# Altium PCB classyTKL.PcbDoc (part 1 of 2)
Units mm, origin at the board's own origin, x right, y up, seen from the top; angles counter-clockwise.
Board outline 346.59 x 122.85 mm, 2 copper layers (Component Side, Bottom Layer), stack 1.571 mm thick; 202 components, 127 nets, 857 pads, 41 vias.
Unrouted connection lines stored in the file: 1.
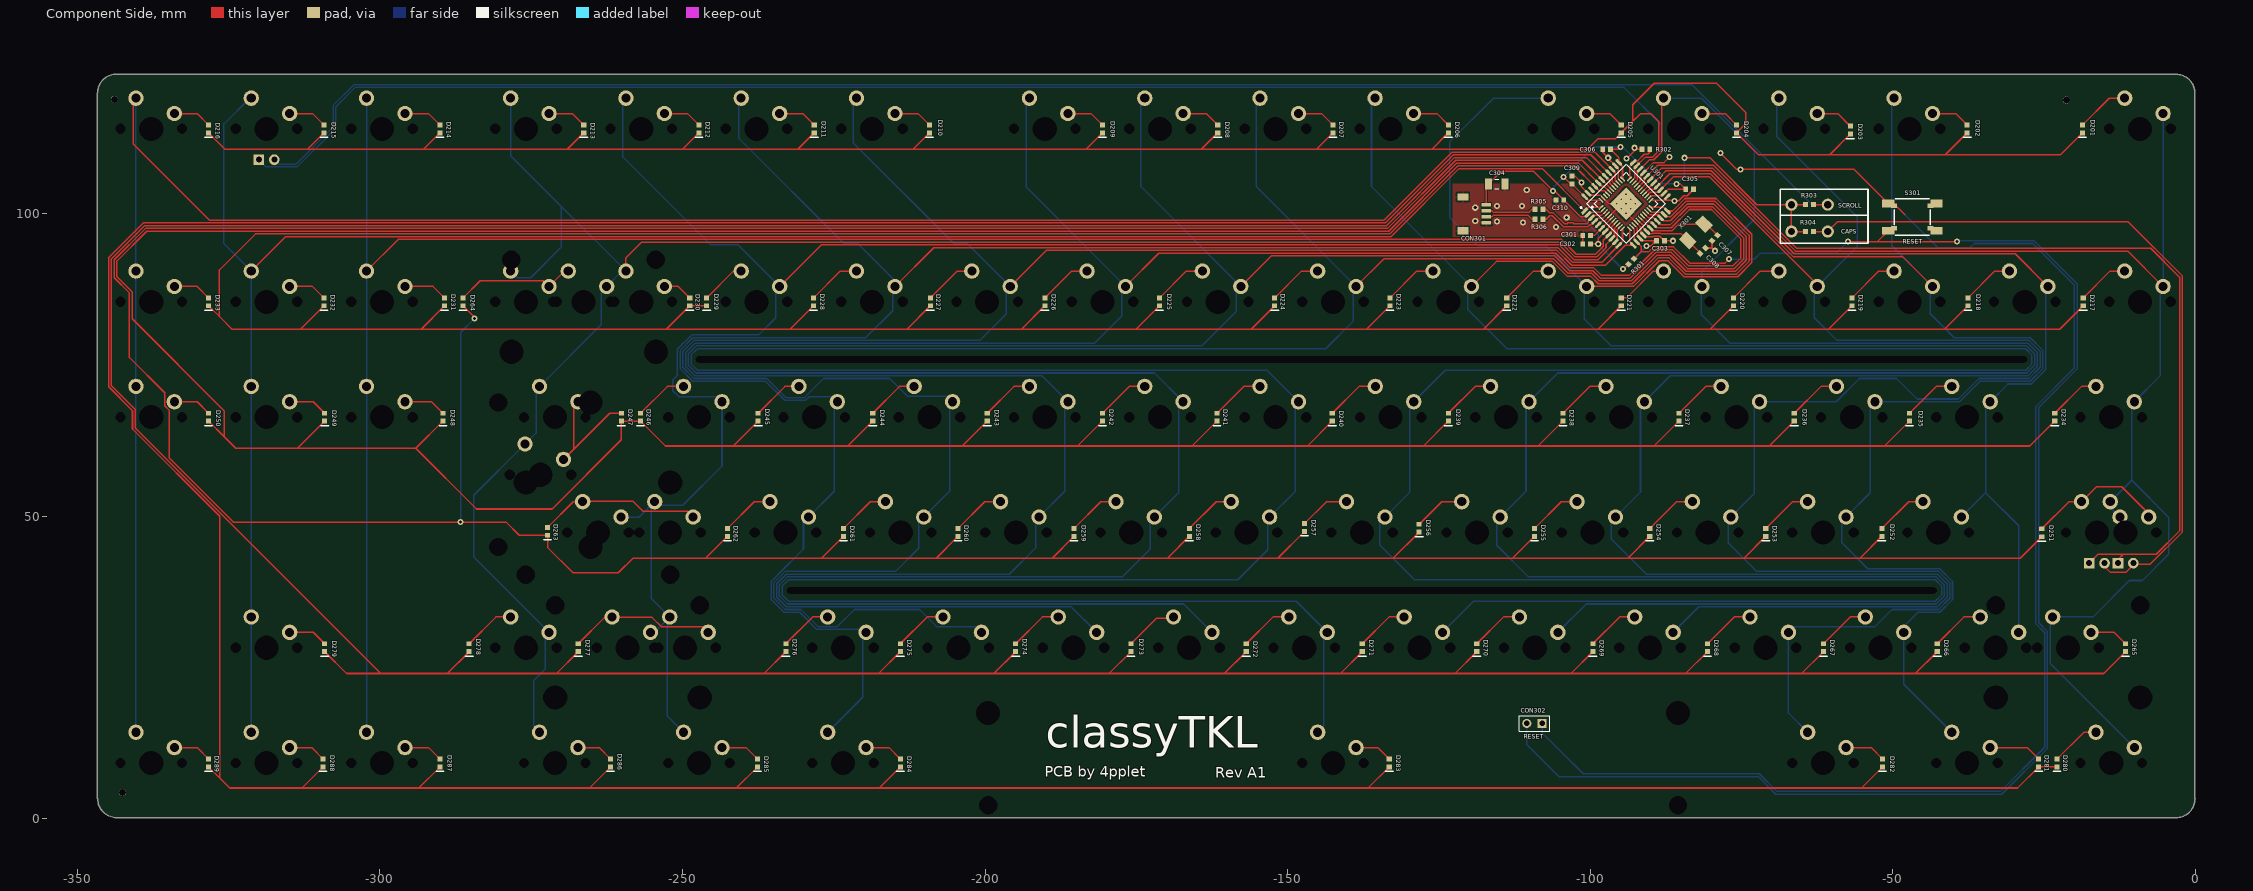
[diagram p0: Component Side view]
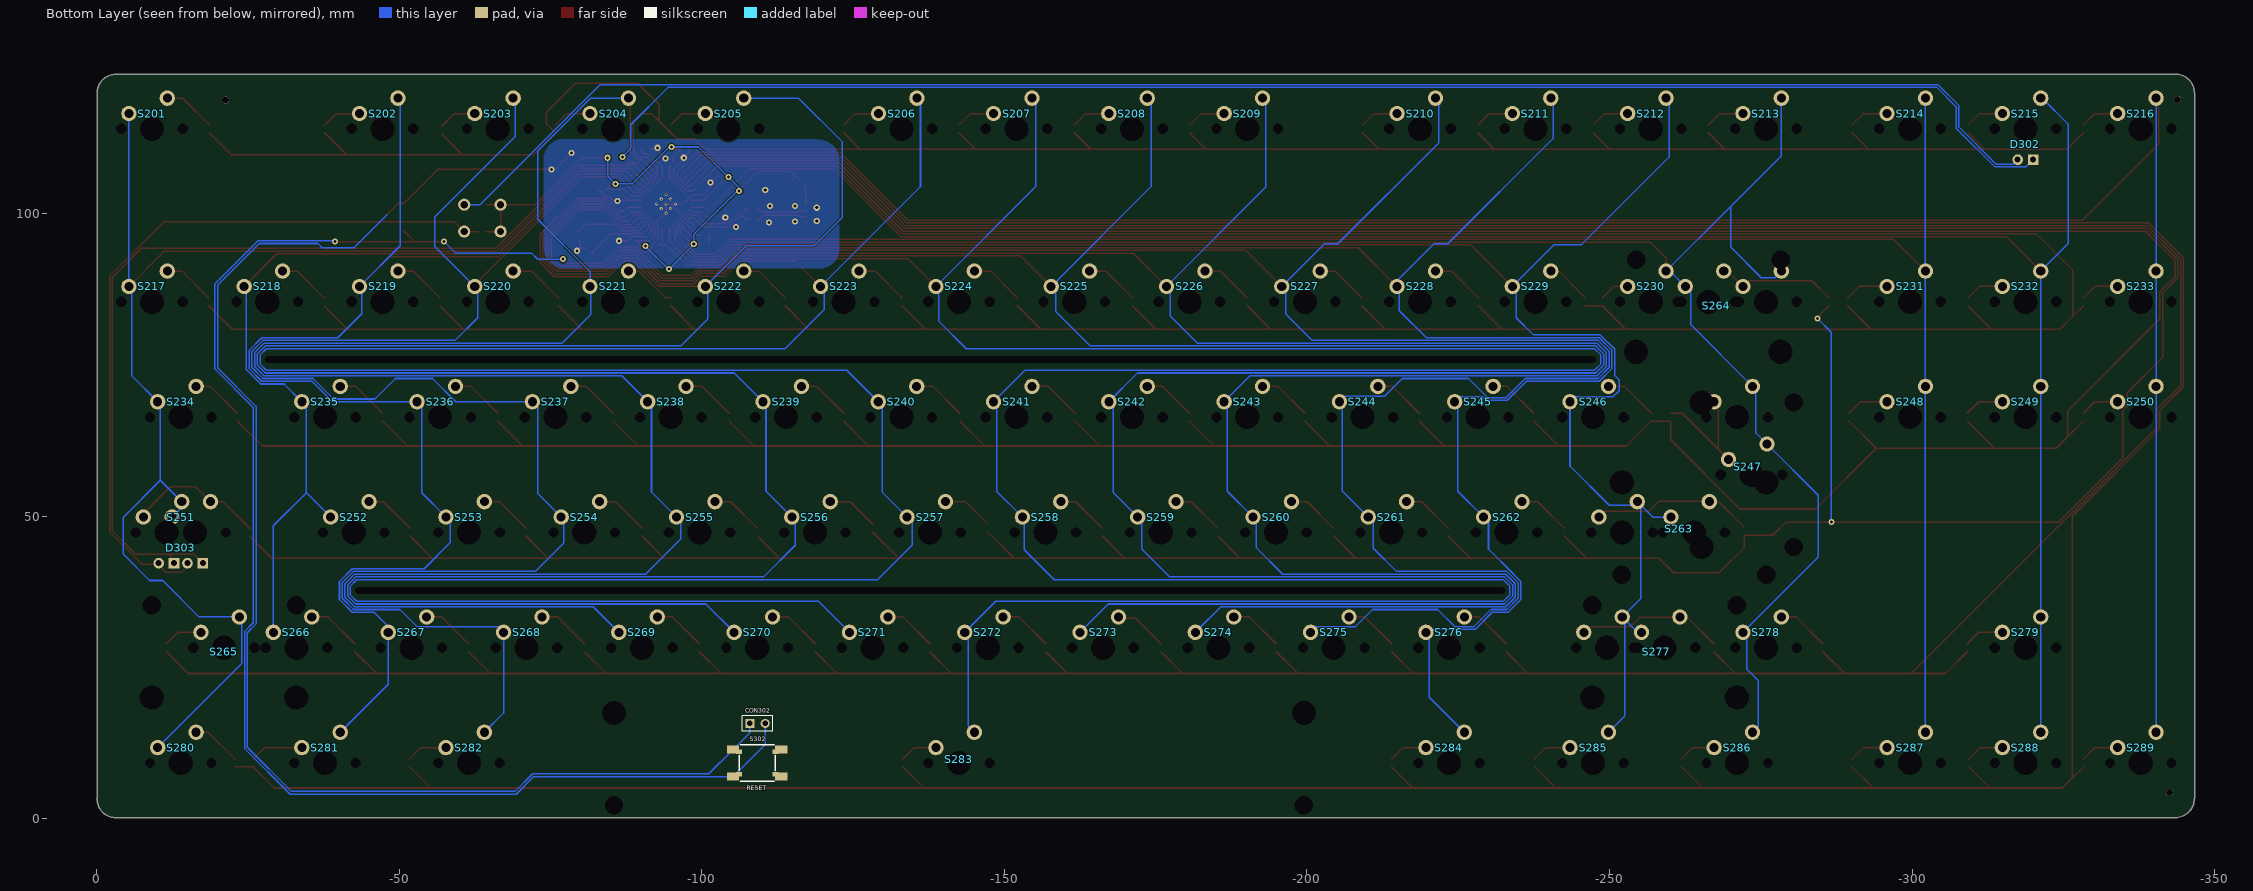
[diagram p1: Bottom Layer view, seen from below]
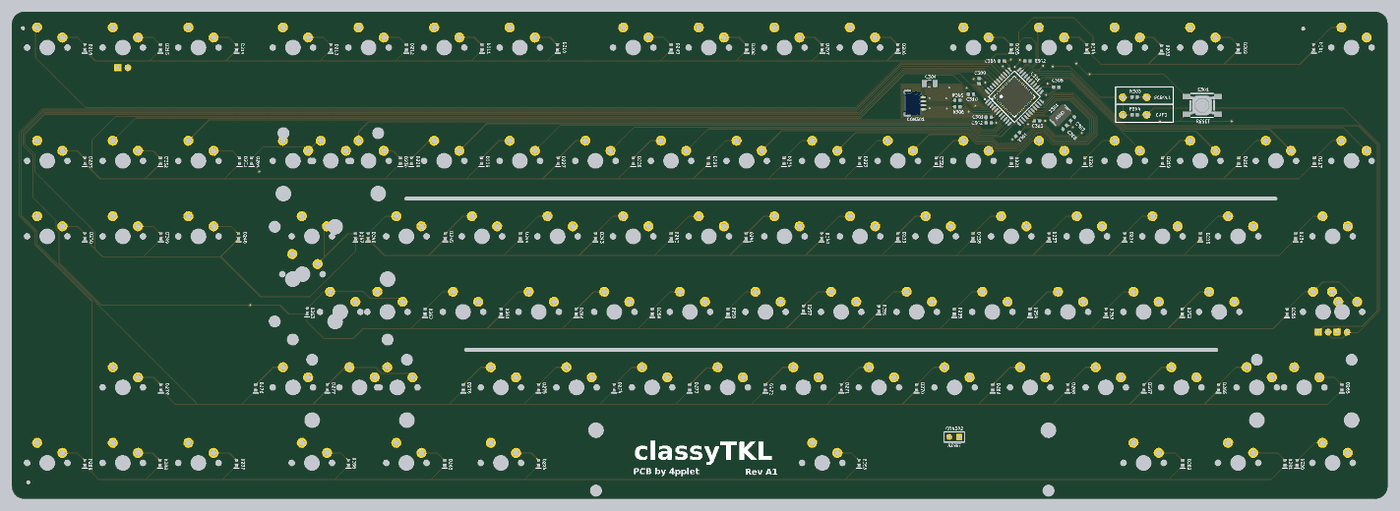
[diagram p3: 3D render of the assembled board from above, using the file's embedded part models]

## Layer stack, top to bottom
Top Solder: solder mask 0.0102, Solder Resist, Dk 3.5
Component Side: signal copper 0.0356
Dielectric 1: core 1.5, FR-4, Dk 4.2
Bottom Layer: signal copper 0.0356
Solder Side: solder mask 0.0102, Solder Resist, Dk 3.5

## Board outline
-346.626,3.234 cw(c-346.531,3.319) -346.659,3.319 -346.659,119.9 cw(c-343.532,119.9) -343.532,123.027 cw(c-343.532,122.9) -343.473,123.013 -3.204,123.013 cw(c-3.204,119.886) -0.077,119.886 -0.077,3.332 cw(c-0.2,3.3) -0.073,3.3 cw(c-3.2,3.3) -3.2,0.173 cw(c-3.2,0.3) -3.267,0.192 -343.5,0.192 cw(c-343.5,3.319)

## Design rules (kind name [scope] priority, off if disabled: settings)
Clearance [All] p1: gap=0.2 ignorepadtopadclearanceinfootprint=FALSE except(0: Arc-Hole Track-Hole SMDPad-Hole THPad-Hole Via-Hole Fill-Hole Poly-Hole Region-Hole Text-Hole; 0.254: THPad-THPad THPad-Via THPad-Fill THPad-Poly THPad-Region THPad-Text Via-Via Via-Fill Via-Poly Via-Region Via-Text Fill-Fill Fill-Poly Fill-Region Fill-Text Poly-Poly Poly-Region Poly-Text Region-Region Region-Text Text-Text)
ComponentClearance [InComponent('No Component') And OnLayer('Component Side')] p1: gap=0.254 collisioncheckmode=3 verticalgap=0.254 showdistances=FALSE
DiffPairsRouting DiffPairsRouting_USB [InDifferentialPairClass('All Differential Pairs')] p1: maxlimit=0.254 minlimit=0.203 mostfreqgap=0.203 toplayer_minwidth=0.152 toplayer_maxwidth=0.381 toplayer_prefwidth=0.152 bottomlayer_minwidth=0.152 bottomlayer_maxwidth=0.381 bottomlayer_prefwidth=0.152 maxuncoupledlength=12.7
DiffPairsRouting [All] p2: maxlimit=0.254 minlimit=0.254 mostfreqgap=0.254 toplayer_minwidth=0.381 toplayer_maxwidth=0.381 toplayer_prefwidth=0.381 bottomlayer_minwidth=0.381 bottomlayer_maxwidth=0.381 bottomlayer_prefwidth=0.381 maxuncoupledlength=12.7
HoleSize [All] p1: absolutevalues=TRUE maxlimit=20 minlimit=0.025 maxpercent=80.000 minpercent=20.000
MatchedLengths MatchedLengths_USB_DiffPairs_1 [All] p1: tolerance=0.127 checknetsindiffpair=TRUE checkdiffpairvsdiffpair=FALSE checkxsignals=FALSE checkothers=FALSE
MatchedLengths MatchedLengths_USB_DiffPairs [All] p2: tolerance=0.127 checknetsindiffpair=TRUE checkdiffpairvsdiffpair=FALSE checkxsignals=FALSE checkothers=FALSE
PolygonConnect PolygonConnect_1 [All vs IsVia] p1: connectstyle=Direct reliefconductorwidth=0.254 reliefentries=4 polygonreliefangle="90 Angle" airgapwidth=0.254
PolygonConnect [All] p2: connectstyle=Relief reliefconductorwidth=0.254 reliefentries=4 polygonreliefangle="90 Angle" airgapwidth=0.254
RoutingVias [All] p1: holewidth=0.711 width=1.27 viastyle="Through Hole" minholewidth=0.711 minwidth=1.27 maxholewidth=0.711 maxwidth=1.27
SolderMaskExpansion [All] p1: expansion=0.102
Width [All] p1: maxlimit=0.254 minlimit=0.203 preferedwidth=0.254
27 further rules are at their usual default settings.

## Classes and differential pairs
component class Designator: C201 C202 C203 C204 C205 C206 D201 D202 D203 D204 D205 D206 D207 D208 D209 D210 D211 D212 D213 D214 D215 D216 D217 D218 D219 D220 D221 D222 D223 D224 D225 D226 D227 D228 D229 D230 D231 D232 D233 D234 D235 D236 D237 D238 D239 D240 D241 D242 D243 D244 D245 D246 D247 D248 D249 D250 D251 D252 D253 D254 D255 D256 D257 D258 D259 D260 D261 D262 D263 D264 D265 D266 D267 D268 D269 D270 D271 D272 D273 D274 D275 D276 D277 D278 D279 D280 D281 D282 D283 D284 D285 D286 D287 D288 D289 S201 S202 S203 S204 S205 S206 S207 S208 S209 S210 S211 S212 S213 S214 S215 S216 S217 S218 S219 S220 S221 S222 S223 S224 S225 S226 S227 S228 S229 S230 S231 S232 S233 S234 S235 S236 S237 S238 S239 S240 S241 S242 S243 S244 S245 S246 S247 S248 S249 S250 S251 S252 S253 S254 S255 S256 S257 S258 S259 S260 S261 S262 S263 S264 S265 S266 S267 S268 S269 S270 S271 S272 S273 S274 S275 S276 S277 S278 S279 S280 S281 S282 S283 S284 S285 S286 S287 S288 S289
differential pair D_PRE: +D_PRE_P -D_PRE_N
differential pair D: +D_P -D_N

## Components (designator, comment, footprint, x,y, rotation, side; value= is the part's Value field where it differs from the comment)
C301 "" C0603[1608] -100.584,96.393 r0 top value=1uF
C302 "" C0603[1608] -100.584,94.996 r0 top value=0.1uF
C303 "" C0603[1608] -88.392,95.504 r180 top value=0.1uF
C304 "" C1206[3216] -115.443,104.902 r180 top value=4,7uF
C305 "" C0603[1608] -83.566,104.013 r180 top value=0.1uF
C306 "" C0603[1608] -97.282,110.617 r0 top value=0.1uF
C307 "" C0603[1608] -79.423,95.964 r45 top value=36pF
C308 "" C0603[1608] -81.407,93.853 r225 top value=36pF
C309 "" C0603[1608] -102.997,105.537 r270 top value=0.1uF
C310 "" C0603[1608] -105.029,102.235 r0 top value=0.1uF
CON301 "Header 5" "JST SM04B-SRSS-TB" -121.031,102.755 r270 top
CON302 "Header 2" HDR1X2 -107.95,15.748 r180 top
D201 "Diode" D0603[1608] -18.669,113.99 r270 top
D202 "Diode" D0603[1608] -37.719,113.99 r270 top
D203 "Diode" D0603[1608] -57.023,113.792 r270 top
D204 "Diode" D0603[1608] -75.819,113.99 r270 top
D205 "Diode" D0603[1608] -94.869,113.99 r270 top
D206 "Diode" D0603[1608] -123.444,113.99 r270 top
D207 "Diode" D0603[1608] -142.494,113.99 r270 top
D208 "Diode" D0603[1608] -161.544,113.99 r270 top
D209 "Diode" D0603[1608] -180.594,113.99 r270 top
D210 "Diode" D0603[1608] -209.169,113.99 r270 top
D211 "Diode" D0603[1608] -228.219,113.99 r270 top
D212 "Diode" D0603[1608] -247.269,113.99 r270 top
D213 "Diode" D0603[1608] -266.319,113.99 r270 top
D214 "Diode" D0603[1608] -290.068,113.99 r270 top
D215 "Diode" D0603[1608] -309.245,113.99 r270 top
D216 "Diode" D0603[1608] -328.295,113.99 r270 top
D217 "Diode" D0603[1608] -18.542,85.415 r270 top
D218 "Diode" D0603[1608] -37.592,85.415 r270 top
D219 "Diode" D0603[1608] -56.769,85.415 r270 top
D220 "Diode" D0603[1608] -76.327,85.415 r270 top
D221 "Diode" D0603[1608] -94.869,85.415 r270 top
D222 "Diode" D0603[1608] -113.792,85.415 r270 top
D223 "Diode" D0603[1608] -133.096,85.415 r270 top
D224 "Diode" D0603[1608] -152.146,85.415 r270 top
D225 "Diode" D0603[1608] -171.196,85.415 r270 top
D226 "Diode" D0603[1608] -190.119,85.415 r270 top
D227 "Diode" D0603[1608] -209.042,85.415 r270 top
D228 "Diode" D0603[1608] -228.346,85.415 r270 top
D229 "Diode" D0603[1608] -245.999,85.415 r270 top
D230 "Diode" D0603[1608] -248.793,85.415 r270 top
D231 "Diode" D0603[1608] -289.306,85.415 r270 top
D232 "Diode" D0603[1608] -309.245,85.415 r270 top
D233 "Diode" D0603[1608] -328.295,85.415 r270 top
D234 "Diode" D0603[1608] -23.241,66.365 r270 top
D235 "Diode" D0603[1608] -47.244,66.365 r270 top
D236 "Diode" D0603[1608] -66.294,66.365 r270 top
D237 "Diode" D0603[1608] -85.344,66.365 r270 top
D238 "Diode" D0603[1608] -104.521,66.365 r270 top
D239 "Diode" D0603[1608] -123.444,66.365 r270 top
D240 "Diode" D0603[1608] -142.621,66.365 r270 top
D241 "Diode" D0603[1608] -161.671,66.365 r270 top
D242 "Diode" D0603[1608] -180.594,66.365 r270 top
D243 "Diode" D0603[1608] -199.644,66.365 r270 top
D244 "Diode" D0603[1608] -218.567,66.365 r270 top
D245 "Diode" D0603[1608] -237.49,66.365 r270 top
D246 "Diode" D0603[1608] -256.921,66.365 r270 top
D247 "Diode" D0603[1608] -260.096,66.365 r270 top
D248 "Diode" D0603[1608] -289.56,66.365 r270 top
D249 "Diode" D0603[1608] -309.118,66.365 r270 top
D250 "Diode" D0603[1608] -328.295,66.365 r270 top
D251 "Diode" D0603[1608] -25.4,47.259 r270 top
D252 "Diode" D0603[1608] -51.816,47.315 r270 top
D253 "Diode" D0603[1608] -70.993,47.315 r270 top
D254 "Diode" D0603[1608] -90.17,47.315 r270 top
D255 "Diode" D0603[1608] -109.22,47.315 r270 top
D256 "Diode" D0603[1608] -128.27,48.006 r270 top
D257 "Diode" D0603[1608] -147.193,48.133 r270 top
D258 "Diode" D0603[1608] -166.243,47.315 r270 top
D259 "Diode" D0603[1608] -185.293,47.315 r270 top
D260 "Diode" D0603[1608] -204.47,47.315 r270 top
D261 "Diode" D0603[1608] -223.393,47.315 r270 top
D262 "Diode" D0603[1608] -242.57,47.315 r270 top
D263 "Diode" D0603[1608] -272.288,47.498 r270 top
D264 "Diode" D0603[1608] -286.258,85.415 r270 top
D265 "Diode" D0603[1608] -11.557,28.265 r270 top
D266 "Diode" D0603[1608] -42.672,28.265 r270 top
D267 "Diode" D0603[1608] -61.468,28.265 r270 top
D268 "Diode" D0603[1608] -80.645,28.265 r270 top
D269 "Diode" D0603[1608] -99.568,28.265 r270 top
D270 "Diode" D0603[1608] -118.745,28.265 r270 top
D271 "Diode" D0603[1608] -137.668,28.265 r270 top
D272 "Diode" D0603[1608] -156.845,28.265 r270 top
D273 "Diode" D0603[1608] -175.895,28.265 r270 top
D274 "Diode" D0603[1608] -194.945,28.265 r270 top
D275 "Diode" D0603[1608] -213.995,28.265 r270 top
D276 "Diode" D0603[1608] -232.918,28.265 r270 top
D277 "Diode" D0603[1608] -267.208,28.265 r270 top
D278 "Diode" D0603[1608] -285.242,28.265 r270 top
D279 "Diode" D0603[1608] -309.118,28.265 r270 top
D280 "Diode" D0603[1608] -22.86,9.215 r270 top
D281 "Diode" D0603[1608] -25.908,9.215 r270 top
D282 "Diode" D0603[1608] -51.689,9.215 r270 top
D283 "Diode" D0603[1608] -133.223,9.215 r270 top
D284 "Diode" D0603[1608] -213.995,9.215 r270 top
D285 "Diode" D0603[1608] -237.617,9.215 r270 top
D286 "Diode" D0603[1608] -261.874,9.215 r270 top
D287 "Diode" D0603[1608] -290.068,9.215 r270 top
D288 "Diode" D0603[1608] -309.372,9.215 r270 top
D289 "Diode" D0603[1608] -328.295,9.215 r270 top
D302 "LED0" "MX-SWITCH - LED" -318.712,113.99 r180 bottom
D303 "LED0" "MX-SWITCH - CAPS - LED NO SWITCH" -16.294,47.315 r180 bottom
R301 "Res1" R0603[1608] -93.218,92.075 r45 top value=10K
R302 "Res1" R0603[1608] -90.805,110.617 r180 top value=10K
R303 "Res1" "R0603[1608] - THT" -63.754,101.473 r0 top value=150
R304 "Res1" "R0603[1608] - THT" -63.754,97.028 r0 top value=150
R305 "Res1" R0603[1608] -108.458,100.711 r180 top value=22
R306 "Res1" R0603[1608] -108.458,99.06 r180 top value=22
S201 "MX" "MX-SWITCH - SWITCHED POL" -9.15,113.99 r180 bottom locked
S202 "MX" MX-SWITCH -47.25,113.99 r180 bottom locked
S203 "MX" MX-SWITCH -66.3,113.99 r180 bottom locked
S204 "MX" MX-SWITCH -85.35,113.99 r180 bottom locked
S205 "MX" MX-SWITCH -104.4,113.99 r180 bottom locked
S206 "MX" MX-SWITCH -133.005,113.99 r180 bottom locked
S207 "MX" MX-SWITCH -152.025,113.99 r180 bottom locked
S208 "MX" MX-SWITCH -171.075,113.99 r180 bottom locked
S209 "MX" MX-SWITCH -190.125,113.99 r180 bottom locked
S210 "MX" MX-SWITCH -218.7,113.99 r180 bottom locked
S211 "MX" MX-SWITCH -237.75,113.99 r180 bottom locked
S212 "MX" MX-SWITCH -256.8,113.99 r180 bottom locked
S213 "MX" MX-SWITCH -275.85,113.99 r180 bottom locked
S214 "MX" MX-SWITCH -299.662,113.99 r180 bottom locked
S215 "MX" MX-SWITCH -318.712,113.99 r180 bottom locked
S216 "MX" MX-SWITCH -337.762,113.99 r180 bottom locked
S217 "MX" "MX-SWITCH - SWITCHED POL" -9.15,85.415 r180 bottom locked
S218 "MX" "MX-SWITCH - SWITCHED POL" -28.2,85.415 r180 bottom locked
S219 "MX" "MX-SWITCH - SWITCHED POL" -47.25,85.415 r180 bottom locked
S220 "MX" "MX-SWITCH - SWITCHED POL" -66.3,85.415 r180 bottom locked
S221 "MX" "MX-SWITCH - SWITCHED POL" -85.35,85.415 r180 bottom locked
S222 "MX" "MX-SWITCH - SWITCHED POL" -104.4,85.415 r180 bottom locked
S223 "MX" "MX-SWITCH - SWITCHED POL" -123.45,85.415 r180 bottom locked
S224 "MX" "MX-SWITCH - SWITCHED POL" -142.5,85.415 r180 bottom locked
S225 "MX" "MX-SWITCH - SWITCHED POL" -161.55,85.415 r180 bottom locked
S226 "MX" "MX-SWITCH - SWITCHED POL" -180.6,85.415 r180 bottom
S227 "MX" "MX-SWITCH - SWITCHED POL" -199.65,85.415 r180 bottom locked
S228 "MX" "MX-SWITCH - SWITCHED POL" -218.7,85.415 r180 bottom locked
S229 "MX" "MX-SWITCH - SWITCHED POL" -237.75,85.415 r180 bottom locked
S230 "MX" MX-SWITCH -256.8,85.415 r180 bottom locked
S231 "MX" MX-SWITCH -299.662,85.415 r180 bottom locked
S232 "MX" MX-SWITCH -318.712,85.415 r180 bottom locked
S233 "MX" MX-SWITCH -337.762,85.415 r180 bottom locked
S234 "MX" "MX-SWITCH - 1.5U - SWITCHED POL" -13.912,66.365 r180 bottom locked
S235 "MX" "MX-SWITCH - SWITCHED POL" -37.725,66.365 r180 bottom locked
S236 "MX" "MX-SWITCH - SWITCHED POL" -56.775,66.365 r180 bottom locked
S237 "MX" "MX-SWITCH - SWITCHED POL" -75.825,66.365 r180 bottom locked
S238 "MX" "MX-SWITCH - SWITCHED POL" -94.875,66.365 r180 bottom locked
S239 "MX" "MX-SWITCH - SWITCHED POL" -113.925,66.365 r180 bottom locked
S240 "MX" "MX-SWITCH - SWITCHED POL" -132.975,66.365 r180 bottom locked
S241 "MX" "MX-SWITCH - SWITCHED POL" -152.025,66.365 r180 bottom locked
S242 "MX" "MX-SWITCH - SWITCHED POL" -171.075,66.365 r180 bottom locked
S243 "MX" "MX-SWITCH - SWITCHED POL" -190.125,66.365 r180 bottom locked
S244 "MX" "MX-SWITCH - SWITCHED POL" -209.175,66.365 r180 bottom locked
S245 "MX" "MX-SWITCH - SWITCHED POL" -228.225,66.365 r180 bottom locked
S246 "MX" "MX-SWITCH - SWITCHED POL" -247.275,66.365 r180 bottom locked
S247 "MX" "MX-SWITCH - PIPE_ISO_ENTER" -271.087,66.365 r0 bottom locked
S248 "MX" MX-SWITCH -299.662,66.365 r180 bottom locked
S249 "MX" MX-SWITCH -318.712,66.365 r180 bottom locked
S250 "MX" MX-SWITCH -337.762,66.365 r180 bottom locked
S251 "MX" "MX-SWITCH - CAPS" -16.294,47.315 r180 bottom locked
S252 "MX" "MX-SWITCH - SWITCHED POL" -42.487,47.315 r180 bottom locked
S253 "MX" "MX-SWITCH - SWITCHED POL" -61.537,47.315 r180 bottom locked
S254 "MX" "MX-SWITCH - SWITCHED POL" -80.587,47.315 r180 bottom locked
S255 "MX" "MX-SWITCH - SWITCHED POL" -99.637,47.315 r180 bottom locked
S256 "MX" "MX-SWITCH - SWITCHED POL" -118.687,47.315 r180 bottom locked
S257 "MX" "MX-SWITCH - SWITCHED POL" -137.737,47.315 r180 bottom locked
S258 "MX" "MX-SWITCH - SWITCHED POL" -156.787,47.315 r180 bottom locked
S259 "MX" "MX-SWITCH - SWITCHED POL" -175.837,47.315 r180 bottom locked
S260 "MX" "MX-SWITCH - SWITCHED POL" -194.887,47.315 r180 bottom locked
S261 "MX" "MX-SWITCH - SWITCHED POL" -213.937,47.315 r180 bottom locked
S262 "MX" "MX-SWITCH - SWITCHED POL" -232.987,47.315 r180 bottom locked
S263 "MX" "MX-switch - Enter_ANSI_ISO_KEY" -263.95,47.315 r180 bottom locked
S264 "MX" "MX-SWITCH - BACKSPACE" -266.325,85.415 r180 bottom locked
S265 "MX" "MX-switch - 2.25U" -21.056,28.265 r180 bottom locked
S266 "MX" "MX-SWITCH - SWITCHED POL" -33.02,28.265 r180 bottom locked
S267 "MX" "MX-SWITCH - SWITCHED POL" -52.012,28.265 r180 bottom locked
S268 "MX" "MX-SWITCH - SWITCHED POL" -71.062,28.265 r180 bottom locked
S269 "MX" "MX-SWITCH - SWITCHED POL" -90.112,28.265 r180 bottom locked
S270 "MX" "MX-SWITCH - SWITCHED POL" -109.162,28.265 r180 bottom locked
S271 "MX" "MX-SWITCH - SWITCHED POL" -128.212,28.265 r180 bottom locked
S272 "MX" "MX-SWITCH - SWITCHED POL" -147.262,28.265 r180 bottom locked
S273 "MX" "MX-SWITCH - SWITCHED POL" -166.312,28.265 r180 bottom locked
S274 "MX" "MX-SWITCH - SWITCHED POL" -185.362,28.265 r180 bottom locked
S275 "MX" "MX-SWITCH - SWITCHED POL" -204.412,28.265 r180 bottom locked
S276 "MX" "MX-SWITCH - SWITCHED POL" -223.462,28.265 r180 bottom locked
S277 "MX" "MX-SWITCH - RIGHT SHIFT" -259.08,28.265 r180 bottom locked
S278 "MX" "MX-SWITCH - SWITCHED POL" -275.85,28.265 r180 bottom locked
S279 "MX" MX-SWITCH -318.712,28.265 r180 bottom locked
S280 "MX" "MX-switch - 1.5U - switched pol" -13.912,9.215 r180 bottom locked
S281 "MX" MX-SWITCH -37.724,9.215 r180 bottom locked
S282 "MX" "MX-switch - 1.5U" -61.537,9.215 r180 bottom locked
S283 "MX" "MX-switch - 7u space" -142.499,9.215 r0 bottom locked
S284 "MX" "MX-switch - 1.5U" -223.462,9.215 r180 bottom locked
S285 "MX" MX-SWITCH -247.274,9.215 r180 bottom
S286 "MX" "MX-switch - 1.5U" -271.087,9.215 r180 bottom locked
S287 "MX" MX-SWITCH -299.662,9.215 r180 bottom locked
S288 "MX" MX-SWITCH -318.712,9.215 r180 bottom locked
S289 "MX" MX-SWITCH -337.762,9.215 r180 bottom locked
S301 "SW-PB" "Combo switch" -46.784,99.411 r0 top
S302 "SW-PB" "COMBO SWITCH" -109.162,9.215 r180 bottom
U301 "ATMEGA32U4" ATMEGA32U4-COMBO -94.089,101.607 r45 top
X301 "XTAL" "CTS 445-series crystal" -82.55,96.901 r45 top

## Footprints (in the part's own frame and the unit in brackets; to place one, negate y for a bottom-side part, rotate by r counter-clockwise, add the part's x,y. Pads: shape width x height; smd on the part's side, far side on the other; paste and mask are expansions set on the pad)
ATMEGA32U4-COMBO [mm] "QFP, 44-Leads, Body 9,95x9,95mm, Pitch 0,80mm, IPC Medium Density"
  rect 1.35x0.5 smd: 1(-5.675,4)
  oval 1.05x0.25 smd: 1(-3.325,2.5) 2(-3.325,2) 3(-3.325,1.5) 4(-3.325,1) 5(-3.325,0.5) 6(-3.325,0) 7(-3.325,-0.5) 8(-3.325,-1) 9(-3.325,-1.5) 10(-3.325,-2) 11(-3.325,-2.5) 23(3.325,-2.5) 24(3.325,-2) 25(3.325,-1.5) 26(3.325,-1) 27(3.325,-0.5) 28(3.325,0) 29(3.325,0.5) 30(3.325,1) 31(3.325,1.5) 32(3.325,2) 33(3.325,2.5)
  oval 1.35x0.5 smd: 2(-5.675,3.2) 3(-5.675,2.4) 4(-5.675,1.6) 5(-5.675,0.8) 6(-5.675,0) 7(-5.675,-0.8) 8(-5.675,-1.6) 9(-5.675,-2.4) 10(-5.675,-3.2) 11(-5.675,-4) 23(5.675,-4) 24(5.675,-3.2) 25(5.675,-2.4) 26(5.675,-1.6) 27(5.675,-0.8) 28(5.675,0) 29(5.675,0.8) 30(5.675,1.6) 31(5.675,2.4) 32(5.675,3.2) 33(5.675,4)
  oval 0.5x1.35 smd: 12(-4,-5.675) 13(-3.2,-5.675) 14(-2.4,-5.675) 15(-1.6,-5.675) 16(-0.8,-5.675) 17(0,-5.675) 18(0.8,-5.675) 19(1.6,-5.675) 20(2.4,-5.675) 21(3.2,-5.675) 22(4,-5.675) 34(4,5.675) 35(3.2,5.675) 36(2.4,5.675) 37(1.6,5.675) 38(0.8,5.675) 39(0,5.675) 40(-0.8,5.675) 41(-1.6,5.675) 42(-2.4,5.675) 43(-3.2,5.675) 44(-4,5.675)
  oval 0.25x1.05 smd: 12(-2.5,-3.325) 13(-2,-3.325) 14(-1.5,-3.325) 15(-1,-3.325) 16(-0.5,-3.325) 17(0,-3.325) 18(0.5,-3.325) 19(1,-3.325) 20(1.5,-3.325) 21(2,-3.325) 22(2.5,-3.325) 34(2.5,3.325) 35(2,3.325) 36(1.5,3.325) 37(1,3.325) 38(0.5,3.325) 39(0,3.325) 40(-0.5,3.325) 41(-1,3.325) 42(-1.5,3.325) 43(-2,3.325) 44(-2.5,3.325)
  rect 3.81x3.81 smd paste-1000: 43(0,0)
  silkscreen extent -5.8,-4.6 4.6,4.92, body extent -3.6,-3.6 3.6,3.6, height 1
C0603[1608] [mm] "Chip Resistor, 2-Leads, Body 1,57x0,80mm, IPC Medium Density"
  rect 0.8x0.85 smd: 1(-0.65,0) 2(0.65,0)
  body extent -0.83,-0.43 0.82,0.43, height 0.5
C1206[3216] [mm]
  rect 1.2x1.8 smd: 1(-1.35,0) 2(1.35,0)
  silkscreen extent -0.35,-0.8 0.35,0.8, body extent -1.6,-0.9 1.6,0.9, height 1.2
"Combo switch" [mm] "Wurth Electronics Inc."
  rect 2x1.3 smd: 1(-3.975,2.25) 2(-3.975,-2.25) ""(3.975,-2.25) ""(3.975,2.25)
  rect 1x0.75 smd: 1(-3,1.875) 2(-3,-1.875) ""(3,-1.875) ""(3,1.875)
  round 1 on Mech15: ""(0,0)
  silkscreen extent -3,-3 3,3, body extent -3.25,-2.55 3.25,2.55, height 2
"COMBO SWITCH" [mm] "Wurth Electronics Inc."
  rect 2x1.3 smd: 1(-3.975,2.25) 2(-3.975,-2.25) ""(3.975,-2.25) ""(3.975,2.25)
  rect 1x0.75 smd: 1(-3,1.875) 2(-3,-1.875) ""(3,-1.875) ""(3,1.875)
  round 1 on Mech16: ""(0,0)
  silkscreen extent -3,-3 3,3, body extent -3.25,-2.55 3.25,2.55, height 2
"CTS 445-series crystal" [mm]
  rect 1.8x2.4 smd: 1(-1.9,0) 2(1.9,0)
  body extent -2.5,-1.6 2.5,1.6, height 1.3
D0603[1608] [mm] "Chip Resistor, 2-Leads, Body 1,57x0,80mm, IPC Medium Density"
  rect 0.8x0.85 smd: 1(-0.65,0) 2(0.65,0)
  silkscreen extent 1.4,-0.63 1.4,0.64, body extent -0.8,-0.45 0.8,0.45, height 0.59
HDR1X2 [mm] "Connector; Header; 2 Position"
  rect 1.5x1.5 hole 0.9: 1(0,0)
  round 1.5 hole 0.9: 2(2.54,0)
  silkscreen extent -1.27,-1.27 3.81,1.27
"JST SM04B-SRSS-TB" [mm]
  rect 0.6x1.55 smd: 1(1.3,3.875) 2(2.3,3.875) 3(3.3,3.875) 4(4.3,3.875)
  rect 1.2x1.8 smd: 5(0,0) 5(5.6,0)
  body extent -0.21,-0.76 5.79,4.19, height 3.25
MX-SWITCH [mm]
  round 2.54 hole 1.499 mask+0.102: 1(-3.81,2.54) 2(2.54,5.08)
  round 1 hole 1.702 unplated: ""(-5.08,0) ""(5.08,0)
  round 1 hole 3.988 unplated: ""(0,0)
"MX-switch - 1.5U" [mm]
  round 2.54 hole 1.499 mask+0.102: 1(-3.81,2.54) 2(2.54,5.08)
  round 1 hole 1.702 unplated: ""(-5.08,0) ""(5.08,0)
  round 1 hole 3.988 unplated: ""(0,0)
  round 1 on Mech14: ""(0,0)
"MX-SWITCH - 1.5U - SWITCHED POL" [mm]
  round 2.54 hole 1.499 mask+0.102: 1(2.54,5.08) 2(-3.81,2.54)
  round 1 hole 1.702 unplated: ""(-5.08,0) ""(5.08,0)
  round 1 hole 3.988 unplated: ""(0,0)
  round 1 on Mech14: ""(0,0)
"MX-switch - 1.5U - switched pol" [mm]
  round 2.54 hole 1.499 mask+0.102: 1(2.54,5.08) 2(-3.81,2.54)
  round 1 hole 1.702 unplated: ""(-5.08,0) ""(5.08,0)
  round 1 hole 3.988 unplated: ""(0,0)
  round 1 on Mech14: ""(0,0)
"MX-switch - 2.25U" [mil]
  round 100 hole 59 mask+4: 1(-150,100) 2(100,200)
  round 60 hole 157.01 unplated: ""(-470,-325) ""(470,-325)
  round 60 hole 120 unplated: ""(-470,275) ""(470,275)
  round 39.37 hole 67.01 unplated: ""(-200,0) ""(200,0)
  round 39.37 hole 157.01 unplated: ""(0,0)
  round 39.37 on Mech14: ""(0,0)
"MX-switch - 7u space" [mm]
  round 2.54 hole 1.499 mask+0.102: 1(3.81,-2.54) 2(-2.54,-5.08)
  round 1.524 hole 3.988 unplated: ""(-57,-8.255) ""(57,-8.255)
  round 1.524 hole 3.048 unplated: ""(-57,6.985) ""(57,6.985)
  round 1 hole 1.702 unplated: ""(-5.08,0) ""(5.08,0)
  round 1 hole 3.988 unplated: ""(0,0)
  round 1 on Mech14: ""(0,0)
"MX-SWITCH - BACKSPACE" [mil]
  round 100 hole 59 mask+4: 1(100,200) 1(225,100) 2(-150,100) 2(475,200)
  round 60 hole 157.01 unplated: ""(-470,-325) ""(470,-325)
  round 60 hole 120 unplated: ""(-470,275) ""(470,275)
  round 39.37 hole 67.01 unplated: ""(-200,0) ""(175,0) ""(200,0) ""(575,0)
  round 39.37 hole 157.01 unplated: ""(0,0) ""(375,0)
  round 39.37 on Mech14: ""(0,0) ""(375,0)
"MX-SWITCH - CAPS" [mm]
  round 2.54 hole 1.499 mask+0.102: 1(-8.572,2.54) 1(2.54,5.08) 2(-3.81,2.54) 2(-2.222,5.08)
  round 1 hole 1.702 unplated: ""(-9.842,0) ""(5.08,0)
  round 1 hole 3.988 unplated: ""(-4.763,0) ""(0,0)
  round 1 on Mech14: ""(-4.763,0) ""(0,0)
"MX-SWITCH - CAPS - LED NO SWITCH" [mm]
  round 1.75 hole 1 mask+0.102: 1(-6.033,-5.08) 1(-1.27,-5.08)
  rect 1.75x1.75 hole 1 mask+0.102: 2(-3.493,-5.08) 2(1.27,-5.08)
  round 1 on Mech14: ""(0,0)
"MX-switch - Enter_ANSI_ISO_KEY" [mm]
  round 2.54 hole 1.499 mask+0.102: 1(-15.716,2.54) 1(2.54,5.08) 2(-9.366,5.08) 2(-3.81,2.54)
  round 1 hole 1.702 unplated: ""(-16.986,0) ""(-6.826,0) ""(-5.08,0) ""(5.08,0)
  round 1.524 hole 3.048 unplated: ""(-11.938,-6.985) ""(11.938,-6.985)
  round 1.524 hole 3.988 unplated: ""(-11.938,8.255) ""(11.938,8.255)
  round 1 hole 3.988 unplated: ""(-11.906,0) ""(0,0)
  round 1 on Mech14: ""(-11.906,0) ""(-11.906,0) ""(0,0) ""(0,0)
"MX-SWITCH - LED" [mm]
  round 1.75 hole 1 mask+0.102: 1(-1.27,-5.08)
  rect 1.75x1.75 hole 1 mask+0.102: 2(1.27,-5.08)
  round 1 on Mech14: ""(0,0)
"MX-SWITCH - PIPE_ISO_ENTER" [mm]
  round 2.54 hole 1.499 mask+0.102: 1(1.429,6.985) 1(3.81,-2.54) 2(-4.921,4.445) 2(-2.54,-5.08)
  round 1.524 hole 3.048 unplated: ""(-9.366,-2.413) ""(-9.366,21.463)
  round 1 hole 1.702 unplated: ""(-7.461,9.525) ""(-5.08,0) ""(2.699,9.525) ""(5.08,0)
  round 1 hole 3.988 unplated: ""(-2.381,9.525) ""(0,0)
  round 1 on Mech14: ""(-2.381,9.525) ""(-2.381,9.525) ""(0,0) ""(0,0)
  round 1.524 hole 3.988 unplated: ""(5.874,-2.413) ""(5.874,21.463)
"MX-SWITCH - RIGHT SHIFT" [mil]
  round 100 hole 59 mask+4: 1(-525,100) 1(100,200) 2(-275,200) 2(-150,100)
  round 39.37 hole 67.01 unplated: ""(-575,0) ""(-200,0) ""(-175,0) ""(200,0)
  round 60 hole 157.01 unplated: ""(-470,-325) ""(470,-325)
  round 60 hole 120 unplated: ""(-470,275) ""(470,275)
  round 39.37 hole 157.01 unplated: ""(-375,0) ""(0,0)
  round 39.37 on Mech14: ""(-375,0) ""(0,0)
"MX-SWITCH - SWITCHED POL" [mm]
  round 2.54 hole 1.499 mask+0.102: 1(2.54,5.08) 2(-3.81,2.54)
  round 1 hole 1.702 unplated: ""(-5.08,0) ""(5.08,0)
  round 1 hole 3.988 unplated: ""(0,0)
R0603[1608] [mm] "Chip Resistor, 2-Leads, Body 1,57x0,80mm, IPC Medium Density"
  rect 0.8x0.85 smd: 1(-0.65,0) 2(0.65,0)
  body extent -0.83,-0.43 0.82,0.43, height 0.5
"R0603[1608] - THT" [mm] "Chip Resistor, 2-Leads, Body 1,57x0,80mm, IPC Medium Density"
  round 2 hole 1.2: 1(-3,0) 2(3,0)
  rect 0.8x0.85 smd: 1(-0.65,0) 2(0.65,0)
  body extent -0.83,-0.43 0.82,0.43, height 0.5

## Part data
C301: library part Cap, "Capacitor", LCSC MFG="Samsung Electro-Mechanics", LCSC Part #=C15849, MFG=KEMET, MFGPN=C0603C104M5RACTU, MRF.Part=CL10A105KB8NNNC, Version="0603 imperial"
C302 C303 C305 C306 C309 C310: library part Cap, "Capacitor", LCSC MFG=YAGEO, LCSC Part #=C14663, MFG=KEMET, MFGPN=C0603C104M5RACTU, MRF.Part=CC0603KRX7R9BB104, Version="0603 imperial"
C304: library part Cap, "Capacitor", LCSC MFG="Guangdong Fenghua Advanced Tech", LCSC Part #=C29823, MFG=KEMET, MFGPN=C0603C104M5RACTU, MRF.Part=1206B475K500NT, Version="1206 imperial"
C307 C308: library part Cap, "Capacitor", LCSC MFG="Samsung Electro-Mechanics", LCSC Part #=C159790, MFG=KEMET, MFGPN=C0603C104M5RACTU, MRF.Part=CL10C360JB8NNNC, Version="0603 imperial"
CON301: "JST for USB daughter board", LCSC MFG="JST Sales America", LCSC Part #=C160404, MFG="JST Sales America Inc.", MFGPN=SM04B-SRSS-TB(LF)(SN), MRF.Part=SM04B-SRSS-TB(LF)(SN)
CON302: "Header, 2-Pin"
D201 D202 D203 D204 D205 D206 D207 D208 D209 D210 D211 D212 D213 D214 D215 D216 D217 D218 D219 D220 D221 D222 D223 D224 D225 D226 D227 D228 D229 D230 D231 D232 D233 D234 D235 D236 D237 D238 D239 D240 D241 D242 D243 D244 D245 D246 D247 D248 D249 D250 D251 D252 D253 D254 D255 D256 D257 D258 D259 D260 D261 D262 D263 D264 D265 D266 D267 D268 D269 D270 D271 D272 D273 D274 D275 D276 D277 D278 D279 D280 D281 D282 D283 D284 D285 D286 D287 D288 D289: "Default Diode", LCSC MFG="Brightking Elec (TAIWAN)", LCSC Part #=C109002, MFG="Bourns Inc.", MFGPN=CD0603-B0340R, MRF.Part=CD4148WTP, Version="0603 imperial"
D302 D303: "Typical INFRARED GaAs LED"
R301 R302: "Resistor", LCSC MFG="Uniroyal Elec", LCSC Part #=C25804, MFG="Panasonic Electronic Components", MFGPN=ERJ-3EKF5101V, MRF.Part=0603WAF1002T5E, Version="0603 imperial"
R303 R304: "Resistor", Version="0603 imperial"
R305 R306: "Resistor", LCSC MFG="Uniroyal Elec", LCSC Part #=C23345, MFG="Panasonic Electronic Components", MFGPN=ERJ-3EKF5101V, MRF.Part=0603WAF220JT5E, Version="0603 imperial"
S201 S202 S203 S204 S205 S206 S207 S208 S209 S210 S211 S212 S213 S214 S215 S216 S217 S218 S219 S220 S221 S222 S223 S224 S225 S226 S227 S228 S229 S230 S231 S232 S233 S235 S236 S237 S238 S239 S240 S241 S242 S243 S244 S245 S246 S247 S248 S249 S250 S251 S252 S253 S254 S255 S256 S257 S258 S259 S260 S261 S262 S263 S264 S265 S266 S267 S268 S269 S270 S271 S272 S273 S274 S275 S276 S277 S278 S279 S280 S281 S282 S283 S284 S285 S286 S287 S288 S289: library part SW-PB, "Switch"
S234: library part SW-PB, "TAB"
S301 S302: "Switch", LCSC MFG="XKB Enterprise", LCSC Part #=C318888, MFG=C&K, MFGPN="PTS645SM43SMTR92 LFS", MRF.Part=TS-1187A-C-D-B
U301: "MCU", LCSC MFG="Microchip Tech", LCSC Part #=C45874, MFG="Microchip Technology", MFGPN=ATMEGA32U4-MUR, MRF.Part=ATMEGA32U4-MUR
X301: "Crystal Oscillator", LCSC MFG="Yangxing Tech", LCSC Part #=C112572, MRF.Part=X503216MSB2GI

## Free pads (board coordinates)
  round 1.152 hole 1.152 unplated paste+0.148 mask+0.148: ""(-343.879,118.873) ""(-342.519,4.318) ""(-21.336,118.745)
  round 0 hole 1 slot 220 at 0 deg: ""(-137.795,75.89)
  round 0 hole 1 slot 190 at 0 deg: ""(-137.737,37.719)

## Via types
v1: diameter 1, hole 0.5, Component Side to Bottom Layer, tented both sides, 32 vias
v2: diameter 0.508, hole 0.254, Component Side to Bottom Layer, tented bottom, 9 vias

## Nets (pads, with @x,y where several pads share a name; then routed paths per layer and width w, separated by ;. In a path a pad name is that pad's centre, name@x,y a point inside that pad or via, vN(x,y) a via of type N, cw(c..) or ccw(c..) an arc to the next point about the centre after c; other vN are vias at no path point)
caps_led: D303.2 U301.29 | length 159.8
  Component Side w0.254: U301.29@-92.091,104.311 -91.059,105.343 -91.059,105.768 U301.29@-90.642,106.185 -88.858,107.969 -79.62,107.969 -65.915,94.264 -7.403,94.264 -2.613,89.474 -2.613,47.559 -6.484,43.688 -11.938,43.688 ; D303.2@-17.564,42.235 -16.111,43.688 -11.938,43.688 ; D303.2@-12.802,42.235 -12.802,42.824 -11.938,43.688
col1: S201.2 S217.2 S234.2 S251.2 S265.2 S280.2 U301.28 | length 232.6
  Component Side w0.254: U301.28@-91.738,103.958 U301.28@-90.076,105.619 -88.18,107.515 -79.808,107.515 -66.103,93.81 -11.195,93.81 S217.2@-5.34,87.955
  Bottom Layer w0.254: S251.2@-12.484,49.855 -14.071,51.443 S251.2@-14.071,52.395 -10.541,55.925 ; S280.2@-10.102,11.755 -24.003,25.656 -24.003,32.938 S265.2@-23.596,33.345 -16.947,33.345 -10.922,39.37 -8.763,39.37 -4.445,43.688 -4.445,49.829 -10.541,55.925 ; S201.2@-5.34,116.53 S217.2@-5.34,87.955 -5.842,87.453 -5.842,73.166 S234.2@-10.102,68.905 -10.541,68.467 -10.541,55.925
col2: S218.2 S235.2 S252.2 S266.2 U301.27 | length 147.9
  Component Side w0.254: U301.27@-91.384,103.604 -90.521,104.467 -90.097,104.467 U301.27@-89.51,105.054 -87.503,107.061 -79.996,107.061 -66.291,93.356 -29.791,93.356 S218.2@-24.39,87.955
  Bottom Layer w0.254: S252.2@-38.677,49.855 -34.671,53.862 ; S266.2@-29.21,30.805 -29.21,48.401 -34.671,53.862 ; S218.2@-24.39,87.955 -24.744,87.601 -24.744,74.212 -27.117,71.839 -30.981,71.839 S235.2@-33.915,68.905 -34.671,68.149 -34.671,53.862
col3: S202.2 S219.2 S236.2 S253.2 S267.2 S281.2 U301.26 | length 230.7
  Component Side w0.254: U301.26@-91.031,103.251 -90.268,104.013 -89.42,104.013 U301.26@-88.945,104.488 -86.861,106.572 -80.149,106.572 -66.479,92.902 -48.387,92.902 S219.2@-43.44,87.955 ; S253.2@-58.42,49.163 S253.2@-57.727,49.855
  Bottom Layer w0.254: S202.2@-49.79,119.07 -50.165,118.695 -50.165,94.68 S219.2@-43.44,87.955 -43.815,87.58 -43.815,83.439 -39.863,79.487 -27.305,79.487 -25.198,77.38 -25.198,74.4 -27.305,72.293 -35.581,72.293 -38.969,68.905 S236.2@-52.965,68.905 -53.721,68.149 -53.721,53.862 S253.2@-57.727,49.855 -58.42,49.163 -58.42,45.593 -54.143,41.316 -42.247,41.316 -40.14,39.209 -40.14,36.229 -42.247,34.122 -45.831,34.122 -48.202,31.751 S267.2@-48.202,30.805 -48.202,22.233 S281.2@-40.264,14.295
col4: S203.2 S220.2 S237.2 S254.2 S268.2 S282.2 U301.25 | length 290.1
  Component Side w0.254: U301.25@-90.677,102.897 -90.069,103.505 -88.796,103.505 U301.25@-88.379,103.922 -86.183,106.118 -80.337,106.118 -62.49,88.271 S220.2@-62.49,87.955
  Bottom Layer w0.254: S203.2@-68.84,119.07 -69.215,118.695 -69.215,112.776 -55.88,99.441 -55.88,94.565 S220.2@-62.49,87.955 -62.992,87.453 -62.992,82.804 -59.221,79.033 -27.493,79.033 -25.652,77.192 -25.652,74.588 -27.493,72.747 -35.769,72.747 -39.157,69.359 -45.991,69.359 -49.379,72.747 -55.523,72.747 -59.365,68.905 S237.2@-72.015,68.905 -72.898,68.022 -72.898,53.735 S254.2@-76.777,49.855 -77.216,49.417 -77.216,45.593 -72.485,40.862 -42.435,40.862 -40.594,39.021 -40.594,36.417 -42.435,34.576 -50.127,34.576 -52.955,31.748 -66.309,31.748 S268.2@-67.252,30.805 -67.252,17.47 S282.2@-64.077,14.295
col5: S204.2 S221.2 S238.2 S255.2 S269.2 U301.31 | length 326.9
  Component Side w0.254: U301.31@-92.798,105.018 -92.202,105.615 -92.202,106.887 U301.31@-91.773,107.316 -90.212,108.877 -89.49,108.877 -88.192,110.175 -88.192,118.768 S204.2@-87.89,119.07
  Bottom Layer w0.254: S204.2@-87.89,119.07 -81.612,119.07 -72.898,110.356 -72.898,99.06 -81.54,90.418 S221.2@-81.54,87.955 -81.661,87.834 -81.661,83.312 -76.928,78.579 -27.681,78.579 -26.106,77.004 -26.106,74.776 -27.681,73.201 -86.769,73.201 S238.2@-91.065,68.905 -91.694,68.276 -91.694,53.989 S255.2@-95.827,49.855 -96.52,49.163 -96.52,46.228 -90.7,40.408 -42.623,40.408 -41.048,38.833 -41.048,36.605 -42.623,35.03 -82.077,35.03 S269.2@-86.302,30.805
col6: S205.2 S222.2 S239.2 S256.2 S270.2 U301.22 | length 456.1
  Component Side w0.254: S222.2@-100.59,87.955 -92.858,87.955 -88.595,92.218 -87.173,92.218 -84.506,89.551 -82.202,89.551 -82.201,89.552 -80.879,89.552 -80.878,89.551 -75.641,89.551 -73.295,91.897 -73.295,96.571 -79.213,102.489 -84.363,102.489 -86.43,100.422 U301.22@-87.248,100.422 -87.849,101.023 U301.22@-89.97,101.023
  Bottom Layer w0.254: S205.2@-106.94,119.07 -116.007,119.07 -123.19,111.887 -123.19,99.314 -118.556,94.68 -107.315,94.68 S222.2@-100.59,87.955 -100.965,87.58 -100.965,82.55 -96.54,78.125 -27.869,78.125 -26.56,76.816 -26.56,74.964 -27.869,73.655 -105.365,73.655 S239.2@-110.115,68.905 -110.617,68.403 -110.617,54.116 S256.2@-114.877,49.855 -115.443,49.29 -115.443,45.212 -110.185,39.954 -42.811,39.954 -41.502,38.645 -41.502,36.793 -42.811,35.484 -100.673,35.484 S270.2@-105.352,30.805
col7: S206.2 S223.2 S240.2 S257.2 S271.2 U301.21 | length 530.6
  Component Side w0.254: S223.2@-119.64,87.955 -115.503,92.092 -106.252,92.092 -103.822,89.662 -99.949,89.662 -98.696,88.409 -93.046,88.409 -88.783,92.672 -86.985,92.672 -84.318,90.005 -82.391,90.005 -82.39,90.006 -80.69,90.006 -80.689,90.005 -75.829,90.005 -73.749,92.085 -73.749,96.383 -79.401,102.035 -84.175,102.035 -86.769,99.441 -87.398,99.441 U301.21@-87.813,99.856 -88.179,100.222 -89.876,100.222 U301.21@-90.324,100.67
  Bottom Layer w0.254: S206.2@-135.545,119.07 -136.144,118.471 -136.144,104.459 S223.2@-119.64,87.955 -120.269,87.326 -120.269,84.201 -113.739,77.671 -28.057,77.671 -27.014,76.628 -27.014,75.152 -28.057,74.109 -123.961,74.109 S240.2@-129.165,68.905 -129.794,68.276 -129.794,53.989 S257.2@-133.927,49.855 -134.747,49.036 -134.747,45.212 -129.035,39.5 -42.999,39.5 -41.956,38.457 -41.956,36.981 -42.999,35.938 -119.269,35.938 S271.2@-124.402,30.805
col8: S207.2 S224.2 S241.2 S258.2 S272.2 S283.2 U301.20 | length 576.8
  Component Side w0.254: S224.2@-138.69,87.955 -134.099,92.546 -106.064,92.546 -103.634,90.116 -99.761,90.116 -98.508,88.863 -93.234,88.863 -88.971,93.126 -86.797,93.126 -84.13,90.459 -82.579,90.459 -82.578,90.46 -80.502,90.46 -80.501,90.459 -76.017,90.459 -74.203,92.273 -74.203,96.195 -79.589,101.581 -83.987,101.581 -86.762,98.806 -87.894,98.806 U301.20@-88.379,99.291 -88.856,99.768 -90.129,99.768 U301.20@-90.677,100.316
  Bottom Layer w0.254: S207.2@-154.565,119.07 -155.194,118.441 -155.194,104.459 S224.2@-138.69,87.955 -139.192,87.453 -139.192,82.169 -143.69,77.671 -247.533,77.671 -248.576,76.628 -248.576,75.152 -247.533,74.109 -153.419,74.109 S241.2@-148.215,68.905 -148.717,68.403 -148.717,54.116 S258.2@-152.977,49.855 -153.289,49.544 -153.289,44.45 -158.239,39.5 -232.475,39.5 -233.518,38.457 -233.518,36.981 -232.475,35.938 -148.585,35.938 S272.2@-143.452,30.805 -144.018,30.239 -144.018,15.316 S283.2@-145.039,14.295
col9: S208.2 S225.2 S242.2 S259.2 S273.2 U301.19 | length 503.2
  Component Side w0.254: S259.2@-172.466,49.417 S259.2@-172.027,49.855 ; S225.2@-157.74,87.955 -152.695,93 -105.876,93 -103.446,90.57 -99.573,90.57 -98.32,89.317 -93.422,89.317 -89.159,93.58 -86.609,93.58 -83.942,90.913 -82.767,90.913 -82.766,90.914 -80.314,90.914 -80.313,90.913 -76.205,90.913 -74.657,92.461 -74.657,96.007 -79.777,101.127 -83.799,101.127 -86.809,98.117 -88.337,98.117 U301.19@-88.945,98.725 -89.534,99.314 -90.382,99.314 U301.19@-91.031,99.962
  Bottom Layer w0.254: S208.2@-173.615,119.07 -174.244,118.441 -174.244,104.459 S225.2@-157.74,87.955 -158.496,87.199 -158.496,83.82 -164.191,78.125 -247.721,78.125 -249.03,76.816 -249.03,74.964 -247.721,73.655 -172.015,73.655 S242.2@-167.265,68.905 -168.021,68.149 -168.021,53.862 S259.2@-172.027,49.855 -172.72,49.163 -172.72,44.577 -177.343,39.954 -232.663,39.954 -233.972,38.645 -233.972,36.793 -232.663,35.484 -167.181,35.484 S273.2@-162.502,30.805
col10: S209.2 S226.2 S243.2 S260.2 S274.2 U301.18 | length 447.2
  Component Side w0.254: S226.2@-176.79,87.955 -171.291,93.454 -105.688,93.454 -103.258,91.024 -99.385,91.024 -98.132,89.771 -93.61,89.771 -89.347,94.034 -86.421,94.034 -83.754,91.367 -82.955,91.367 -82.954,91.368 -80.126,91.368 -80.125,91.367 -76.393,91.367 -75.111,92.649 -75.111,95.819 -79.965,100.673 -83.611,100.673 -86.621,97.663 -89.014,97.663 U301.18@-89.51,98.159 -90.03,98.679 -90.454,98.679 U301.18@-91.384,99.609
  Bottom Layer w0.254: S209.2@-192.665,119.07 -193.167,118.568 -193.167,104.332 S226.2@-176.79,87.955 -177.419,87.326 -177.419,83.058 -181.898,78.579 -247.909,78.579 -249.484,77.004 -249.484,74.776 -247.909,73.201 -190.611,73.201 S243.2@-186.315,68.905 -186.817,68.403 -186.817,54.116 S260.2@-191.077,49.855 -191.643,49.29 -191.643,44.761 -195.996,40.408 -232.851,40.408 -234.426,38.833 -234.426,36.605 -232.851,35.03 -185.777,35.03 S274.2@-181.552,30.805
col11: S210.2 S227.2 S244.2 S261.2 S275.2 U301.12 | length 361.4
  Component Side w0.254: S227.2@-195.84,87.955 -189.887,93.908 -105.5,93.908 -103.07,91.478 -97.498,91.478 -94.211,94.765 U301.12@-92.904,94.765 -93.505,95.366 U301.12@-93.505,97.488
  Bottom Layer w0.254: S210.2@-221.24,119.07 -221.742,118.568 -221.742,111.633 -205.105,94.996 -202.881,94.996 S227.2@-195.84,87.955 -196.469,87.326 -196.469,83.439 -200.875,79.033 -248.097,79.033 -249.938,77.192 -249.938,74.588 -248.097,72.747 -236.069,72.747 -232.918,69.596 -229.834,69.596 -226.683,72.747 -215.749,72.747 -212.85,69.848 -206.308,69.848 S244.2@-205.365,68.905 -205.867,68.403 -205.867,54.116 S261.2@-210.127,49.855 -210.947,49.036 -210.947,44.704 -214.789,40.862 -233.039,40.862 -234.88,39.021 -234.88,36.417 -233.039,34.576 -230.432,34.576 -227.604,31.748 -224.405,31.748 -221.577,34.576 -210.852,34.576 -208.024,31.748 -201.545,31.748 S275.2@-200.602,30.805
col12: S211.2 S228.2 S245.2 S262.2 S276.2 S284.2 U301.11 | length 318.7
  Component Side w0.254: S228.2@-214.89,87.955 -208.483,94.362 -105.312,94.362 -102.882,91.932 -98.107,91.932 U301.11@-95.273,94.765 -94.672,95.366 U301.11@-94.672,97.488
  Bottom Layer w0.254: S211.2@-240.29,119.07 -240.665,118.695 -240.665,112.395 -223.266,94.996 -220.98,94.996 -214.89,88.906 S228.2@-214.89,87.955 -215.265,87.58 -215.265,83.947 -219.71,79.502 -244.475,79.502 -244.49,79.487 -248.285,79.487 -250.392,77.38 -250.392,74.4 -248.285,72.293 -236.257,72.293 -233.106,69.142 -229.645,69.142 -229.064,69.723 -225.233,69.723 S245.2@-224.415,68.905 -224.917,68.403 -224.917,54.116 S262.2@-229.177,49.855 -229.997,49.036 -229.997,44.577 -234.188,40.386 -234.188,40.355 -235.334,39.209 -235.334,36.229 -233.227,34.122 -230.62,34.122 -227.792,31.294 -220.141,31.294 S276.2@-219.652,30.805 -220.218,30.239 -220.218,20.079 S284.2@-226.002,14.295
col13: S212.2 S229.2 S246.2 S263.2 S277.2 S285.2 U301.10 | length 305.6
  Component Side w0.254: S229.2@-233.94,87.955 -227.079,94.816 -105.124,94.816 -102.694,92.386 -98.735,92.386 -95.839,95.282 U301.10@-95.839,95.331 -95.527,95.643 -95.527,97.34 U301.10@-95.026,97.841
  Bottom Layer w0.254: S263.2@-260.14,49.855 -257.124,49.855 S263.2@-255.143,51.836 ; S212.2@-259.34,119.07 -259.842,118.568 -259.842,109.347 -245.364,94.869 -240.854,94.869 S229.2@-233.94,87.955 -234.569,87.326 -234.569,82.804 -237.417,79.956 -248.458,79.956 -250.846,77.568 -250.846,73.258 -251.587,72.517 -251.587,70.739 -250.571,69.723 -244.283,69.723 S246.2@-243.465,68.905 -243.465,58.287 -249.936,51.816 -254.005,51.816 S263.2@-254.584,52.395 S263.2@-255.143,51.836 ; S277.2@-255.27,30.805 -254.635,30.805 S277.2@-252.476,32.964 ; S285.2@-249.814,14.295 -252.476,16.957 S277.2@-252.476,32.964 ; S263.2@-255.143,51.836 -255.143,36.393 S277.2@-252.095,33.345 S277.2@-252.476,32.964